# Altium PCB Buck.PcbDoc
Units mm, origin at the board's own origin, x right, y up, seen from the top; angles counter-clockwise.
Board outline 90 x 70 mm, 2 copper layers (Top Layer, Bottom Layer); 70 components, 46 nets, 283 pads, 89 vias.
Unrouted connection lines stored in the file: 49.
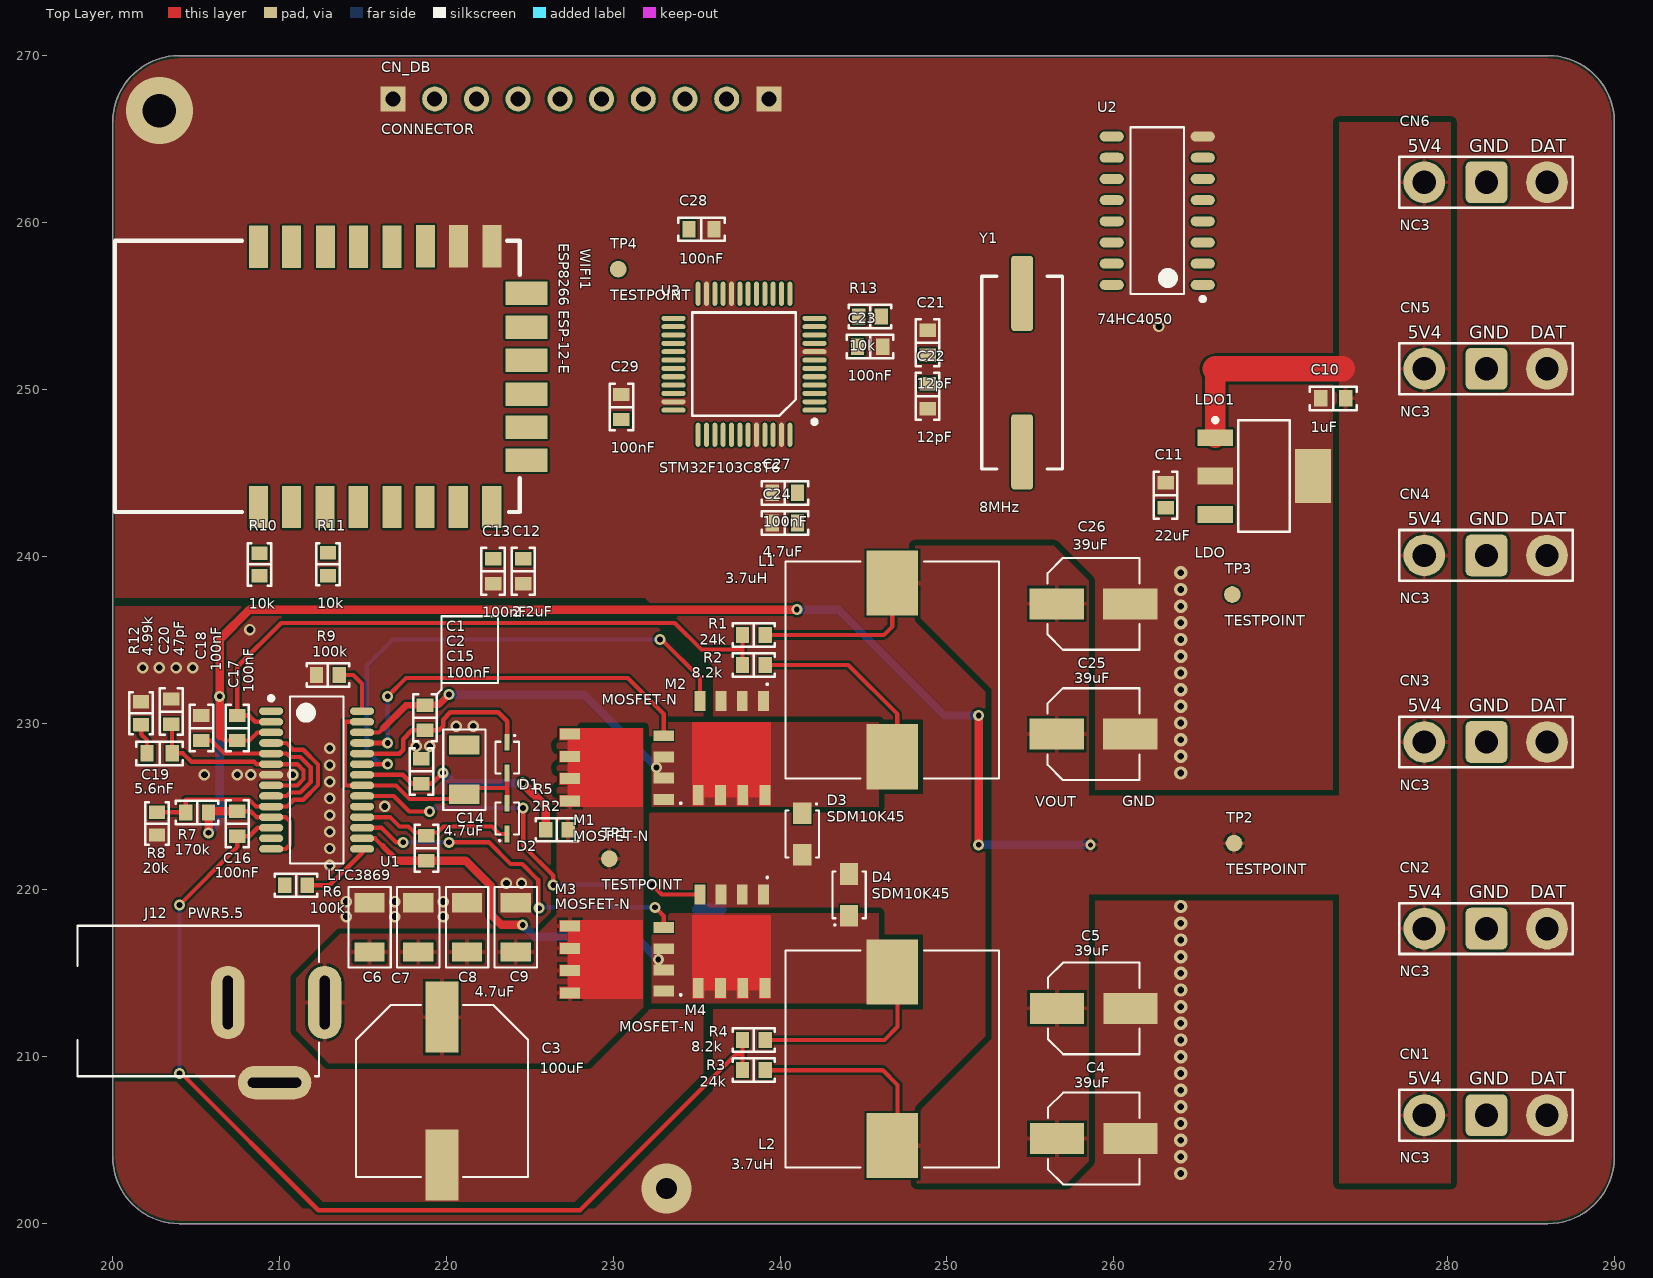
[diagram p0: Top Layer view]
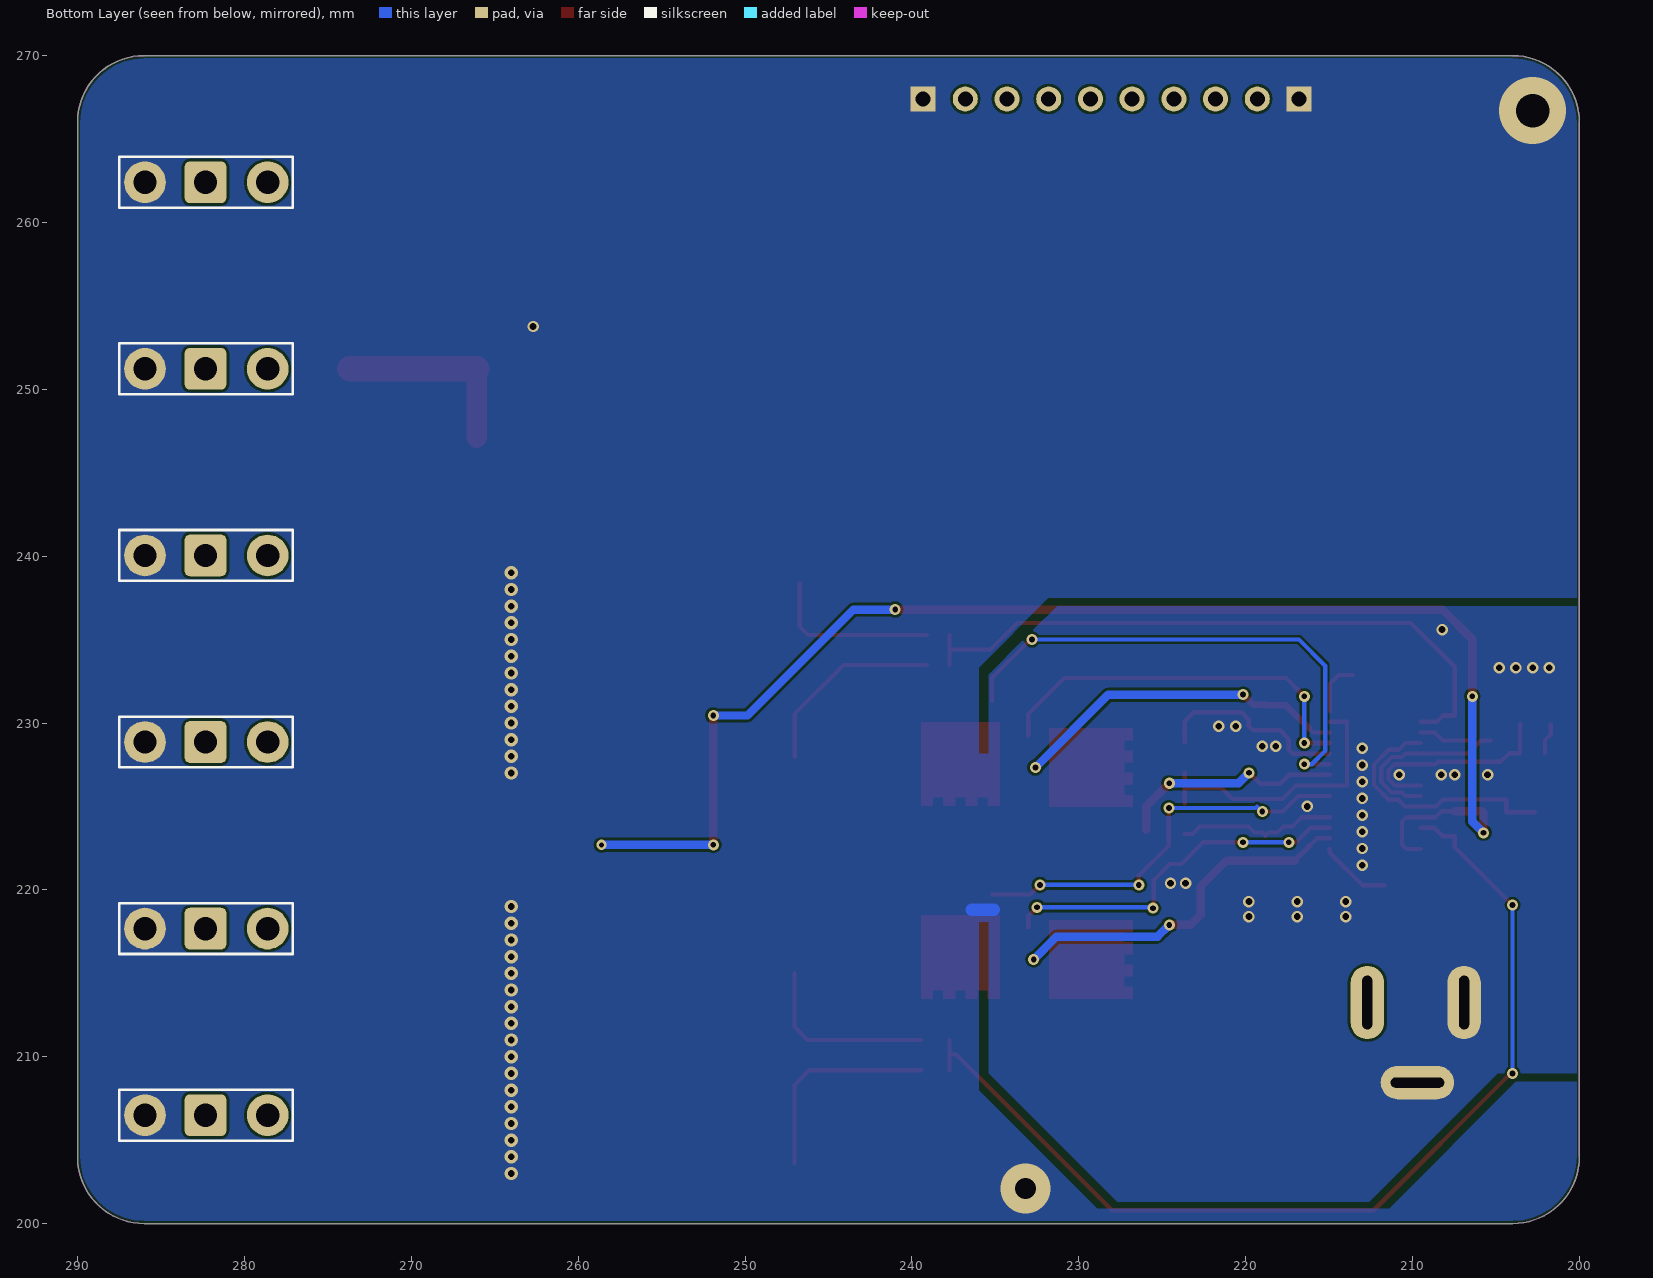
[diagram p1: Bottom Layer view, seen from below]

## Layer stack, top to bottom
Top Solder: solder mask 0.0102, Solder Resist, Dk 3.5
Top Layer: signal copper 0.0356
Dielectric 1: dielectric 0.32, FR-4, Dk 4.8
Bottom Layer: signal copper 0.0356
Bottom Solder: solder mask 0.0102, Solder Resist, Dk 3.5

## Board outline
204,200 cw(c204,204) 200,204 200,266 cw(c204,266) 204,270 286,270 cw(c286,266) 290,266 290,204 cw(c286,204) 286,200

## Design rules (kind name [scope] priority, off if disabled: settings)
Clearance Clearance_VOUT_TOP [(InComponent('L1') OR InComponent('L2')) AND (InNet('VOUT') OR InNet('SW1') OR InNet('SW2')) vs InNet('GND')] p1: gap=0.152 except(0.305: SMDPad-Poly; 0.5: Poly-Poly)
Clearance [All] p2: gap=0.152 except(0.102: SMDPad-Poly; 0.35: Poly-Poly)
HoleSize [All] p1: absolutevalues=TRUE maxlimit=4 minlimit=0.025 maxpercent=80.000 minpercent=20.000
MinimumSolderMaskSliver [All] p1: minsoldermaskwidth=0.152
PolygonConnect PolygonConnect_J12 [InNet('GND') vs HasFootprint('DC_CON') OR HasFootprint('CAPAE6053X59M')] p1: connectstyle=Direct reliefconductorwidth=0.254 reliefentries=4 polygonreliefangle="90 Angle" airgapwidth=0.254
PolygonConnect PolygonConnect_VIN [InNet('VIN') or InNet('SW1') or InNet('SW2') or InNet('VOUT') or ((IsVia OR IsPad) ANd InNet('GND'))] p2: connectstyle=Direct reliefconductorwidth=0.254 reliefentries=4 polygonreliefangle="90 Angle" airgapwidth=0.152
PolygonConnect [All] p3: connectstyle=Relief reliefconductorwidth=0.254 reliefentries=4 polygonreliefangle="90 Angle" airgapwidth=0.152
RoomDefinition XmasLights [InComponentClass('XmasLights')] p1: confinementstyle=ConfineIn formatcopy=TRUE lockcomponents=FALSE outline 0,0 50.8,0 50.8,25.4 0,25.4
RoutingVias [All] p1: holewidth=0.35 width=0.66 viastyle="Through Hole" minholewidth=0.3 minwidth=0.61 maxholewidth=1 maxwidth=1.372
SilkToSilkClearance [All vs False] p1: silktosilkclearance=0.254
SilkToSolderMaskClearance [False] p1: minsilkscreentomaskgap=0.254 clearancetoexposedcopper=TRUE
SolderMaskExpansion SolderMaskExpansion_via [IsVia] p1: expansion=0
SolderMaskExpansion [All] p2: expansion=0.102
Width [All] p1: maxlimit=1.219 minlimit=0.152 preferedwidth=0.152
26 further rules are at their usual default settings.

## Classes and differential pairs
component class XmasLights: C10 C11 C12 C13 C21 C22 C23 C24 C27 C28 C29 CN1 CN2 CN3 CN4 CN5 CN6 CN_DB J12 LDO1 R10 R11 R13 TP1 TP2 TP3 TP4 U2 U3 WIFI1 Y1
component class PowerBuck: C1 C2 C3 C4 C5 C6 C7 C8 C9 C14 C15 C16 C17 C18 C19 C20 C25 C26 D1 D2 D3 D4 L1 L2 M1 M2 M3 M4 R1 R2 R3 R4 R5 R6 R7 R8 R9 R12 U1

## Components (designator, comment, footprint, x,y, rotation, side; value= is the part's Value field where it differs from the comment)
C1 "100nF" "CAP 0603/1608" 218.716,230.311 r270 top
C2 "100nF" "CAP 0603/1608" 218.8,222.5 r270 top
C3 "100uF" CAPAE115102X102N 219.737,207.948 r270 top
C4 "39uF" CAPAE6053X59M 258.796,205.096 r0 top
C5 "39uF" CAPAE6053X59M 258.796,212.9 r0 top
C6 "4.7uF" CAP1206 215.395,217.753 r270 top
C7 "4.7uF" CAP1206 218.317,217.753 r270 top
C8 "4.7uF" CAP1206 221.238,217.753 r270 top
C9 "4.7uF" CAP1206 224.159,217.753 r270 top
C10 "1uF" "CAP 0603/1608" 273.143,249.454 r180 top
C11 "22uF" "CAP 0603/1608" 263.1,243.65 r90 top
C12 "2.2uF" "CAP 0603/1608" 224.604,239.1 r270 top
C13 "100nF" "CAP 0603/1608" 222.8,239.1 r270 top
C14 "4.7uF" CAP1206 221.078,227.205 r270 top
C15 "100nF" "CAP 0603/1608" 218.5,227.1 r90 top
C16 "100nF" "CAP 0603/1608" 207.469,223.961 r270 top
C17 "100nF" "CAP 0603/1608" 207.469,229.7 r90 top
C18 "100nF" "CAP 0603/1608" 205.316,229.7 r90 top
C19 "5.6nF" "CAP 0603/1608" 202.811,228.181 r180 top
C20 "47pF" "CAP 0603/1608" 203.511,230.685 r90 top
C21 "12pF" "CAP 0603/1608" 248.84,252.786 r270 top
C22 "12pF" "CAP 0603/1608" 248.84,249.582 r90 top
C23 "100nF" "CAP 0603/1608" 245.389,252.554 r0 top
C24 "4.7uF" "CAP 0603/1608" 240.287,241.987 r180 top
C25 "39uF" CAPAE6053X59M 258.78,229.336 r0 top
C26 "39uF" CAPAE6053X59M 258.78,237.14 r0 top
C27 "100nF" "CAP 0603/1608" 240.287,243.791 r180 top
C28 "100nF" "CAP 0603/1608" 235.287,259.587 r0 top
C29 "100nF" "CAP 0603/1608" 230.487,248.937 r90 top
CN1 "NC3" LEDCON3 282.3,206.5 r0 top
CN2 "NC3" LEDCON3 282.3,217.681 r0 top
CN3 "NC3" LEDCON3 282.3,228.861 r0 top
CN4 "NC3" LEDCON3 282.3,240.042 r0 top
CN5 "NC3" LEDCON3 282.3,251.222 r0 top
CN6 "NC3" LEDCON3 282.3,262.403 r0 top
CN_DB "CONNECTOR" "Edge Connector" 236.8,267.4 r180 top
D1 "SDM10K45" DIOM1713X11N 223.641,227.929 r270 top
D2 "SDM10K45" DIOM1713X11N 223.641,224.275 r90 top
D3 "SDM10K45" DIOM2618X11N 241.326,223.351 r270 top
D4 "SDM10K45" DIOM2618X11N 244.13,219.7 r90 top
J12 "PWR5.5" DC_CON 209.706,208.45 r0 top
L1 "3.7uH" INDP130128X62N 246.726,233.18 r90 top
L2 "3.7uH" INDP130128X62N 246.726,209.871 r270 top
LDO1 "LDO" SOT230P700X180-4N 269,244.8 r0 top
M1 "MOSFET-N" INF-PG-TDSON-8-1_V 230.2,227.329 r90 top
M2 "MOSFET-N" INF-PG-TDSON-8-1_V 237.096,228.479 r180 top
M3 "MOSFET-N" INF-PG-TDSON-8-1_V 230.2,215.835 r90 top
M4 "MOSFET-N" INF-PG-TDSON-8-1_V 237.096,216.9 r180 top
R1 "24k" "RES 0603/1608" 238.421,235.276 r180 top
R2 "8.2k" "RES 0603/1608" 238.421,233.471 r180 top
R3 "24k" "RES 0603/1608" 238.421,209.196 r0 top
R4 "8.2k" "RES 0603/1608" 238.421,211 r180 top
R5 "2R2" "RES 0603/1608" 226.625,223.6 r180 top
R6 "100k" "RES 0603/1608" 210.99,220.275 r0 top
R7 "170k" "RES 0603/1608" 205.064,224.646 r0 top
R8 "20k" "RES 0603/1608" 202.66,223.966 r270 top
R9 "100k" "RES 0603/1608" 212.9,232.883 r180 top
R10 "10k" "RES 0603/1608" 208.8,239.5 r90 top
R11 "10k" "RES 0603/1608" 212.9,239.515 r90 top
R12 "4.99k" "RES 0603/1608" 201.707,230.585 r90 top
R13 "10k" "RES 0603/1608" 245.389,254.358 r180 top
TP1 "TESTPOINT" TESTPOINT 229.765,221.865 r90 top
TP2 "TESTPOINT" TESTPOINT 267.2,222.8 r90 top
TP3 "TESTPOINT" TESTPOINT 267.1,237.7 r90 top
TP4 "TESTPOINT" TESTPOINT 230.3,257.2 r90 top
U1 "LTC3869" SOP64P600X175-28N 212.223,226.579 r0 top
U2 "74HC4050" SOIC127P600X175-16N 262.6,260.7 r180 top
U3 "STM32F103C8T6" CQFP50P900X900X160-48N 237.835,251.5 r180 top
WIFI1 "ESP8266 ESP-12-E" "ESP8266 ESP-12-E" 225.156,259.53 r90 top
Y1 "8MHz" CRYSTAL 254.5,251 r90 top

## Footprints (in the part's own frame and the unit in brackets; to place one, negate y for a bottom-side part, rotate by r counter-clockwise, add the part's x,y. Pads: shape width x height; smd on the part's side, far side on the other; paste and mask are expansions set on the pad)
CAP1206 [mm]
  rrect1% 1.16x1.82 smd: 1(1.475,0) 2(-1.475,0)
  silkscreen extent -2.41,-1.27 2.41,1.27, body extent -1.6,-0.81 1.6,0.81, height 0.57
"CAP 0603/1608" [mm] "Chip Capacitor, 2-Leads, Body 1.60x0.80mm, IPC Medium Density"
  rrect1% 0.8x1 smd: 1(-0.75,0) 2(0.75,0)
  silkscreen extent -1.4,-0.7 1.4,0.7, body extent -0.8,-0.41 0.8,0.41, height 0.82
CAPAE6053X59M [mm] "Aluminum Electrolytic Capacitor, Body 5.30x5.30x5.90mm, IPC Low Density"
  rect 3.25x1.85 smd: 1(-2.2,0) 2(2.2,0)
  silkscreen extent -2.75,-2.75 2.75,2.75, body extent -3,-2.75 3,2.75, height 5.9
CAPAE115102X102N [mm] "Aluminum Electrolytic Capacitor, Body 10.25x10.25x10.20mm, IPC Medium Density"
  rect 4.25x1.95 smd: 1(-4.425,0) 2(4.425,0)
  silkscreen extent -5.15,-5.15 5.15,5.15, body extent -5.77,-5.15 5.77,5.15, height 10.2
CQFP50P900X900X160-48N [mm] "CQFP, 48-Leads, Body 9.00x9.00mm, Pitch 0.50mm, IPC Medium Density"
  oval 1.45x0.3 smd: 1(-4.225,2.75) 2(-4.225,2.25) 3(-4.225,1.75) 4(-4.225,1.25) 5(-4.225,0.75) 6(-4.225,0.25) 7(-4.225,-0.25) 8(-4.225,-0.75) 9(-4.225,-1.25) 10(-4.225,-1.75) 11(-4.225,-2.25) 12(-4.225,-2.75) 25(4.225,-2.75) 26(4.225,-2.25) 27(4.225,-1.75) 28(4.225,-1.25) 29(4.225,-0.75) 30(4.225,-0.25) 31(4.225,0.25) 32(4.225,0.75) 33(4.225,1.25) 34(4.225,1.75) 35(4.225,2.25) 36(4.225,2.75)
  oval 0.3x1.45 smd: 13(-2.75,-4.225) 14(-2.25,-4.225) 15(-1.75,-4.225) 16(-1.25,-4.225) 17(-0.75,-4.225) 18(-0.25,-4.225) 19(0.25,-4.225) 20(0.75,-4.225) 21(1.25,-4.225) 22(1.75,-4.225) 23(2.25,-4.225) 24(2.75,-4.225) 37(2.75,4.225) 38(2.25,4.225) 39(1.75,4.225) 40(1.25,4.225) 41(0.75,4.225) 42(0.25,4.225) 43(-0.25,4.225) 44(-0.75,4.225) 45(-1.25,4.225) 46(-1.75,4.225) 47(-2.25,4.225) 48(-2.75,4.225)
  silkscreen extent -4.35,-3.1 3.1,3.57, body extent -4.6,-4.6 4.6,4.6, height 1.45
CRYSTAL [mm] "Crystal, 2-Leads, Body 4.70x11.40mm, Pitch 8.80mm, IPC Medium Density"
  rrect25% 4.5x1.3 smd: 1(-4.75,0) 2(4.75,0)
  silkscreen extent -5.77,-2.43 5.77,2.43, body extent -6.35,-2.35 6.35,2.35, height 4.2
DC_CON [mm]
  oval 2x4.4 hole 0.6 slot 3.2 at 90 deg paste-2.54: 1(3,4.8) 2(-2.8,4.8)
  oval 4.4x2 hole 0.6 slot 3.2 at 0 deg paste-2.54: 3(0,0)
  silkscreen extent -11.81,0.38 2.67,9.4, body extent -11.83,0.43 2.67,9.43, height 10
DIOM1713X11N [mm] "Molded Diode, 2-Leads, Body 1.70x1.30mm, IPC Medium Density"
  rect 1x0.3 smd: 1(-0.925,0) 2(0.925,0)
  silkscreen extent -1.37,-0.7 0.95,0.7, body extent -1.12,-0.7 1.12,0.7, height 1.1
DIOM2618X11N [mm] "Molded Diode, 2-Leads, Body 2.60x1.80mm, IPC Medium Density"
  rect 1.3x1.1 smd: 1(-1.25,0) 2(1.25,0)
  silkscreen extent -1.85,-1 1.4,1, body extent -1.62,-1 1.62,1, height 1.1
"Edge Connector" [mm]
  rrect100% 1.5x1.5 hole 0.9: 1(0,0) 2(2.5,0) 3(5,0) 4(7.5,0) 5(10,0) 6(12.5,0) 7(15,0) 8(17.5,0)
  rrect1% 1.5x1.5 hole 0.9: 9(-2.54,0) 9(20,0)
"ESP8266 ESP-12-E" [mil] "ESP8266 ESP-12-E"
  rrect1% 100x45 smd: 1(-653,646) 2(-653,568) 3(-653,489) 4(-653,411) 5(-653,331) 6(-653,253) 7(-653,175) 8(-653,96) 15(-38,95) 16(-38,174) 17(-38,252) 18(-39,331) 19(-39,410) 20(-39,488) 21(-39,568) 22(-39,646)
  rrect1% 55x100 smd: 9(-543,14) 10(-465,14) 11(-387,14) 12(-307,14) 13(-229,14) 14(-149,14)
  silkscreen extent -665,30 -25,985
INDP130128X62N [mm] "Precision Wire Wound Inductor, 2-Leads, Body 13.00x12.80mm, IPC Medium Density"
  rect 3.9x3.1 smd: 1(-5.2,0) 2(5.2,0)
  silkscreen extent -6.5,-6.4 6.5,6.4, body extent -6.6,-6.4 6.6,6.4, height 6.3
INF-PG-TDSON-8-1_V [mm] "TDSON, 8-Leads, Body 6.15x5.15mm, Pitch 1.27mm"
  rect 0.65x1.2 smd: 1(-1.905,-2.825) 2(-0.635,-2.825) 3(0.635,-2.825) 4(1.905,-2.825) 5(2.007,2.794) 6(0.66,2.794) 7(-0.66,2.794) 8(-2.007,2.794)
  Top Layer region: -2.35,2.925 -2.35,-1.575 2.35,-1.575 2.35,2.925
  Top Layer region: -2.35,2.925 -1.65,2.925 -1.65,3.425 -2.35,3.425
  Top Layer region: 1.65,2.925 2.35,2.925 2.35,3.425 1.65,3.425
  Top Layer region: -1.015,2.925 -0.315,2.925 -0.315,3.425 -1.015,3.425
  Top Layer region: 0.315,2.925 1.015,2.925 1.015,3.425 0.315,3.425
  silkscreen extent -2.23,-3.94 -2.03,-3.74, body extent -2.58,-3.08 2.58,3.08, height 1
LEDCON3 [mm]
  round 2.5 hole 1.4 paste-2.54: 1(-3.692,0) 2(3.658,0)
  rrect25% 2.5x2.5 hole 1.4 paste-2.54: 3(0.033,0)
  silkscreen extent -5.21,-1.52 5.21,1.52
"RES 0603/1608" [mm] "Chip Resistor, 2-Leads, Body 1.60x0.80mm, IPC Medium Density"
  rrect1% 0.8x0.95 smd: 1(-0.68,0) 2(0.68,0)
  silkscreen extent -1.27,-0.7 1.27,0.7, body extent -0.8,-0.4 0.8,0.4, height 0.45
SOIC127P600X175-16N [mm] "SOIC, 16-Leads, Body 9.90x3.90mm, Pitch 1.27mm, IPC Medium Density"
  oval 1.45x0.6 smd: 1(-2.725,4.445) 2(-2.725,3.175) 3(-2.725,1.905) 4(-2.725,0.635) 5(-2.725,-0.635) 6(-2.725,-1.905) 7(-2.725,-3.175) 8(-2.725,-4.445) 9(2.725,-4.445) 10(2.725,-3.175) 11(2.725,-1.905) 12(2.725,-0.635) 13(2.725,0.635) 14(2.725,1.905) 15(2.725,3.175) 16(2.725,4.445)
  silkscreen extent -2.85,-5 1.6,5.42, body extent -3,-5 3,5, height 1.75
SOP64P600X175-28N [mm] "SOP, 28-Leads, Body 9.89x3.90mm, Pitch 0.64mm, IPC Medium Density"
  oval 1.45x0.45 smd: 1(-2.725,4.127) 2(-2.725,3.492) 3(-2.725,2.857) 4(-2.725,2.222) 5(-2.725,1.587) 6(-2.725,0.953) 7(-2.725,0.318) 8(-2.725,-0.318) 9(-2.725,-0.953) 10(-2.725,-1.587) 11(-2.725,-2.222) 12(-2.725,-2.857) 13(-2.725,-3.492) 14(-2.725,-4.127) 15(2.725,-4.127) 16(2.725,-3.492) 17(2.725,-2.857) 18(2.725,-2.222) 19(2.725,-1.587) 20(2.725,-0.953) 21(2.725,-0.318) 22(2.725,0.318) 23(2.725,0.953) 24(2.725,1.587) 25(2.725,2.222) 26(2.725,2.857) 27(2.725,3.492) 28(2.725,4.127)
  silkscreen extent -2.85,-5 1.6,5.03, body extent -3,-5 3,5, height 1.75
SOT230P700X180-4N [mm] "SOT223, 4-Leads, Body 6.50x7.00mm (avg), Pitch 2.30mm, IPC Medium Density"
  rrect1% 2.15x1 smd: 1(-2.925,2.3) 2(-2.925,0) 3(-2.925,-2.3)
  rrect1% 2.15x3.25 smd: 4(2.925,0)
  silkscreen extent -3.05,-3.35 1.55,3.47, body extent -3.5,-3.35 3.5,3.35, height 1.8
TESTPOINT [mm]
  round 1 smd: 1(0,0)

## Part data
C1 C2 C6 C7 C8 C9 C10 C11 C12 C13 C14 C15 C16 C17 C18 C19 C20 C21 C22 C23 C24 C27 C28 C29: library part CAP, "Capacitor"
C3 C4 C5 C25 C26: library part "E CAP"
CN_DB: "Debug Connector"
D1 D2 D3 D4: library part "D Schottky"
J12: library part PWR2.5, "Low Voltage Power Supply Connector"
L1 L2: library part Inductor, "Inductor"
LDO1: "LDO Voltage Regulator"
R1 R2 R3 R4 R5 R6 R7 R8 R9 R10 R11 R12 R13: library part RES, "Resistor"
U3: "Medium-density performance line ARM-based 32-bit MCU with 64 or 128 KB Flash, USB, CAN, 7 timers, 2 ADCs, 9 com. interfaces"
Y1: library part CRYSTAL, "Cheapo SMT Crystal"

## Via types
v1: diameter 0.8, hole 0.4, Top Layer to Bottom Layer, 30 vias
v2: diameter 0.66, hole 0.35, Top Layer to Bottom Layer, 21 vias
v3: diameter 0.686, hole 0.4, Top Layer to Bottom Layer, tented top, 18 vias
v4: diameter 0.686, hole 0.4, Top Layer to Bottom Layer, 7 vias
v5: diameter 0.686, hole 0.4, Top Layer to Bottom Layer, tented both sides, 6 vias
v6: diameter 0.66, hole 0.35, Top Layer to Bottom Layer, tented top, 4 vias
v7: diameter 0.61, hole 0.305, Top Layer to Bottom Layer, 1 vias
v8: diameter 4, hole 2, Top Layer to Bottom Layer, 1 vias
v9: diameter 3, hole 1.25, Top Layer to Bottom Layer, 1 vias

## Nets (pads, with @x,y where several pads share a name; then routed paths per layer and width w, separated by ;. In a path a pad name is that pad's centre, name@x,y a point inside that pad or via, vN(x,y) a via of type N, cw(c..) or ccw(c..) an arc to the next point about the centre after c; other vN are vias at no path point)
BG1: M2.4 U1.23 | length 31.2
  Top Layer w0.254: v2(232.8,235) 232.9,235 235.191,232.709 M2.4@235.191,231.325
  Top Layer w0.279: U1.23 v2(216.482,227.531)
  Bottom Layer w0.254: v2(216.482,227.531) 216.032,227.531 215.233,228.331 215.233,233.433 216.8,235 v2(232.8,235)
BG2: M4.4 U1.20 | length 24.6
  Top Layer w0.254: U1.20 215.526,225.626 215.526,225.622 216.844,225.622 217.777,224.689 v6(219,224.689) ; v2(224.6,224.9) 224.6,222.656 226.4,220.856 v2(226.4,220.3) ; v2(232.327,220.3) 232.902,219.725 M4.4
  Bottom Layer w0.254: v6(219,224.689) 219.311,225 219.411,224.9 v2(224.6,224.9) ; v2(226.4,220.3) v2(232.327,220.3)
BOOST1: C1.2 D1.1 U1.24 | length 11.8
  Top Layer w0.279: U1.24 217.186,228.166 217.41,228.39 217.41,229.034 217.936,229.561 C1.2 219.546,229.561 219.804,229.819 219.804,230.207 220.236,230.64 223.104,230.64 223.641,230.102 D1.1
BOOST2: C2.1 D2.1 U1.18 | length 9.6
  Top Layer w0.254: U1.18 216.628,224.356 217.185,223.8 217.72,223.8 218.083,223.437 218.613,223.437 C2.1 218.987,223.437 219.456,223.437 219.82,223.8 222.741,223.8 223.191,223.35 D2.1
DTR: CN_DB.6 WIFI1.18
FREQ: R9.1 U1.28 | length 3.2
  Top Layer w0.254: R9.1 214.417,232.883 214.948,232.352 U1.28
GND: C3.2 C4.2 C5.2 C6.2 C7.2 C8.2 C9.2 C10.2 C11.2 C12.2 C13.2 C18.2 C20.2 C21.1 C22.1 C23.2 C24.2 C25.2 C26.2 C27.2 C28.2 C29.2 CN1.2 CN2.2 CN3.2 CN4.2 CN5.2 CN6.2 CN_DB.9 D3.2 D4.2 J12.2 J12.3 LDO1.2 LDO1.4 M2.1 M2.2 M2.3 M4.1 M4.2 M4.3 R8.2 R9.2 R12.2 U1.7 U2.8 U3.8 U3.20 U3.23 U3.35 U3.44 U3.47 WIFI1.15 WIFI1.16 | length 1.3
  Top Layer w0.305: v4@216.291,224.991 v4(216.3,225)
  Bottom Layer w0.762: 235.1,218.8 236.4,218.8
  other v1: 264,203 264,204 264,205 264,206 264,207 264,208 264,209 264,210 264,211 264,212 264,213 264,214 264,215 264,216 264,217 264,218 264,219 264,227 264,228 264,229 264,230 264,231 264,232 264,233 264,234 264,235 264,236 264,237 264,238 264,239
  other v3: 214,218.4 216.9,218.4 219.8,218.4 214,219.3 216.9,219.3 219.8,219.3 213.008,221.479 213.008,222.479 213.008,223.479 213.008,224.479 213.008,225.479 213.008,226.479 210.8,226.9 213.008,227.479 213.008,228.479 220.6,229.8 221.6,229.8 262.7,253.76
  other v4: 205.5,226.896 201.8,233.307 202.8,233.307 203.8,233.307 204.8,233.307 208.226,235.6
  other v5: 223.6,220.4 224.5,220.4 207.469,226.9 208.28,226.896 218.2,228.607 218.996,228.607
  other v8: 202.8,266.7
  other v9: 233.2,202.1
HD0: CN1.3 U2.2
HD1: CN2.3 U2.4
HD2: CN3.3 U2.6
HD3: CN4.3 U2.10
HD4: CN5.3 U2.12
HD5: CN6.3 U2.15
INTVCC: C14.1 D1.2 D2.2 U1.21 U1.27 | length 17
  Top Layer w0.254: U1.27 213.916,230.071 213.916,226.261 U1.21 216.973,226.261 217.789,225.445 220.794,225.445 C14.1 221.451,226.102 223.641,226.102 ; D2.2@223.641,225.194 D2.2 223.641,226.102 ; D1.2@223.641,227.029 D1.2 223.641,226.102
ITH: C19.1 C20.1 U1.6 U1.8 | length 12.7
  Top Layer w0.254: C20.1 203.561,229.885 C19.1 204.219,228.181 204.719,227.681 208.478,227.681 208.628,227.531 U1.6 209.502,227.535 211.063,227.535 211.435,227.163 211.435,226.637 211.06,226.261 U1.8
LD0: U2.3 U3.10
LD1: U2.5 U3.11
LD2: U2.7 U3.12
LD3: U2.9 U3.13
LD4: U2.11 U3.14
LD5: U2.14 U3.15
NetC14_2: C14.2 C15.2 U1.19
NetC19_2: C19.2 R12.1 | length 1.9
  Top Layer w0.254: R12.1 201.707,229.329 202.061,228.975 C19.2
NetR11_2: R11.2 WIFI1.3
OSC_IN: C22.2 U3.5 Y1.1
OSC_OUT: C21.2 U3.6 Y1.2
PGOOD: R6.2 U1.15 | length 4.3
  Top Layer w0.279: R6.2 212.995,220.275 214.948,222.228 U1.15
RST1: C23.1 CN_DB.5 R13.2 U3.7
RTS: CN_DB.1 R10.2 WIFI1.1
RX0: CN_DB.7 WIFI1.21
SENSE1+: C17.2 R1.2 R2.2 U1.2 | length 38.9
  Top Layer w0.254: C17.2 207.469,233.369 210.1,236 233.685,236 235.285,234.4 237.741,234.4 ; R2.2 237.741,234.4 ; R1.2 237.741,234.4
  Top Layer w0.279: C17.2 208.166,230.45 208.544,230.071 U1.2
SENSE2+: C16.2 R3.1 R4.2 U1.12 | length 60.7
  Top Layer w0.254: v2(204,209) 204.123,209 212.323,200.8 228,200.8 237.341,210.141 237.741,210.141 ; v2(204,219.1) 207.469,222.569 C16.2 ; R3.1 237.741,210.141 ; R4.2 237.741,210.141
  Top Layer w0.279: C16.2 208.177,223.211 208.688,223.721 U1.12
  Bottom Layer w0.254: v2(204,209) v2(204,219.1)
SS: C18.1 U1.5 U1.9 | length 10.8
  Top Layer w0.254: C18.1 205.911,228.95 206.695,228.166 U1.5 210.432,228.166 210.631,227.967 211.242,227.967 211.867,227.342 211.867,226.458 211.238,225.83 210.628,225.83 210.425,225.626 U1.9
SW1: C1.1 D3.1 L1.1 M1.1 M1.2 M1.3 M2.5 M2.6 M2.7 M2.8 R2.1 U1.26 | length 32.1
  Top Layer w0.254: U1.26 215.952,229.436 216.215,229.7 ; R2.1 244.084,233.471 247.026,230.53 L1.1@247.026,227.98
  Top Layer w0.406: 216.215,229.7 217.576,231.061 C1.1 218.755,231.1 219.548,231.1 v2(220.148,231.7)
  Bottom Layer w0.508: v2(220.148,231.7) 228.229,231.7 v6(232.6,227.329)
SW2: C2.2 D4.1 L2.1 M3.1 M3.2 M3.3 M4.5 M4.6 M4.7 M4.8 R4.1 U1.16 | length 32.9
  Top Layer w0.254: U1.16 215.729,223.086 216.181,222.635 ; R4.1@239.417,211 246.247,211 247.041,211.794 L2.1@247.041,215
  Top Layer w0.33: 216.181,222.635 217.066,221.75
  Top Layer w0.508: 217.066,221.75 C2.2 221.144,221.75 222.7,220.194 222.7,218.5 223.3,217.9 v2(224.575,217.9)
  Bottom Layer w0.508: v2(224.575,217.9) 225.275,217.2 231.335,217.2 v6(232.7,215.835)
SWCLK: CN_DB.4 U3.37
SWDIO: CN_DB.3 U3.34
TG1: M1.4 U1.25 | length 23.5
  Top Layer w0.254: v2(216.481,231.6) 217.581,232.7 230.872,232.7 233.025,230.547 M1.4
  Top Layer w0.279: U1.25 214.949,228.8 v2(216.481,228.8)
  Bottom Layer w0.254: v2(216.481,228.8) v2(216.481,231.6)
TG2: M3.4 U1.17 | length 22
  Top Layer w0.254: U1.17 216.115,223.721 216.984,222.852 v2(217.41,222.852) ; v2(220.148,222.852) 222.548,222.852 223.845,221.555 224.545,221.555 225.5,220.6 225.5,218.958 v2(225.558,218.9) ; v2(232.5,218.957) 233.025,218.432 M3.4
  Bottom Layer w0.254: v2(217.41,222.852) v2(220.148,222.852) ; v2(225.558,218.9) 225.615,218.957 v2(232.5,218.957)
TX0: CN_DB.8 WIFI1.22
TX1: TP4.1 U3.22 WIFI1.17
VCC3_3: C11.1 C12.1 C13.1 C24.1 C27.1 C28.1 C29.1 CN_DB.2 LDO1.3 R10.1 R11.1 R13.1 TP3.1 U2.1 U3.9 U3.24 U3.36 U3.48 WIFI1.8
VCC5_7: C4.1 C5.1 C10.1 C16.1 C17.1 C25.1 C26.1 CN1.1 CN2.1 CN3.1 CN4.1 CN5.1 CN6.1 L1.2 L2.2 LDO1.1 R1.1 R3.2 R7.2 TP2.1 U1.3 U1.11 U1.14 | length 124.9
  Top Layer w0.254: R7.2 R7.2@205.809,224.711 ; 206.416,229.2 206.666,228.95 C17.1 208.184,228.95 208.67,229.436 U1.3 ; C16.1 208.263,224.711 208.618,224.356 U1.11 210.366,224.356 210.623,224.1 210.623,222.7 210.375,222.451 U1.14 ; R1.1 246.215,235.276 246.726,235.786 L1.2 ; R3.2@239.417,209.196 246.146,209.196 247.041,208.3 L2.2@247.041,203.6
  Top Layer w0.508: v2(205.744,223.421) R7.2 ; R7.2@205.809,224.711 C16.1 ; 206.416,229.2 v2(206.416,231.6) 206.416,235.016 208.2,236.8 v2(241,236.8) ; v2(251.9,222.7) v2(251.9,230.45)
  Top Layer w1.219: LDO1.1 266.075,251.222
  Top Layer w1.524: 266.075,251.222 273.7,251.222
  Bottom Layer w0.508: v2(205.744,223.421) 206.416,224.092 v2(206.416,231.6) ; v2(241,236.8) 243.5,236.8 249.85,230.45 v2(251.9,230.45) ; v2(251.9,222.7) v7(258.6,222.7) v7@258.575,222.675
VCC24: C3.1 C6.1 C7.1 C8.1 C9.1 J12.1 M1.5 M1.6 M1.7 M1.8 M3.5 M3.6 M3.7 M3.8 R5.1 TP1.1
VFB: R7.1 R8.1 U1.4 U1.10 | length 15.7
  Top Layer w0.254: R8.1 R7.1 204.384,225.413 208.171,225.413 208.593,224.991 U1.10 210.443,224.991 210.849,225.398 211.417,225.398 212.299,226.279 212.299,227.521 211.421,228.399 210.81,228.399 210.407,228.801 U1.4
VIN2: C15.1 R5.2 U1.22 | length 13.7
  Top Layer w0.279: U1.22 217.374,226.896 217.914,226.356 219.132,226.356 v2(219.792,227.016)
  Top Layer w0.508: v6(224.575,226.389) 225.945,225.019 R5.2
  Bottom Layer w0.508: v2(219.792,227.016) 220.42,226.389 v6(224.575,226.389)
pads on no net: R6.1 U1.1 U1.13 U2.13 U2.16 U3.1 U3.2 U3.3 U3.4 U3.16 U3.17 U3.18 U3.19 U3.21 U3.25 U3.26 U3.27 U3.28 U3.29 U3.30 U3.31 U3.32 U3.33 U3.38 U3.39 U3.40 U3.41 U3.42 U3.43 U3.45 U3.46 WIFI1.2 WIFI1.4 WIFI1.5 WIFI1.6 WIFI1.7 WIFI1.9 WIFI1.10 WIFI1.11 WIFI1.12 WIFI1.13 WIFI1.14 WIFI1.19 WIFI1.20

## Polygon pours and split planes (outlines as drawn)
GND on Top Layer "GND_JOIN" (solid, pour order 25): 235,228.143 236.5,228.143 236.5,218.167 235,218.167
VCC24 on Top Layer "VIN_TOP" (solid, pour order 12): 231.8,212.959 231.8,229.7 226.625,229.7 226.625,218.525 225.457,217.357 213.641,217.357 211,214.716 211,211.543 212.943,209.6 228.449,209.6
SW2 on Top Layer "SW1_TOP" (solid, remove dead copper, pour order 13): 232.316,218.6 245.9,218.6 245.9,213.2 232.316,213.2
SW1 on Top Layer "SW2_TOP" (solid, remove dead copper, pour order 16): 232.316,230.054 245.9,230.054 245.9,224.975 232.316,224.975
VCC5_7 on Top Layer "VOUT_TOP" (solid, remove dead copper, pour order 17): 258.5,238.522 258.5,225.626 273.5,225.626 273.5,266 280.2,266 280.2,202.425 273.5,202.425 273.5,219.725 258.5,219.725 258.5,203.746 257.179,202.425 248.2,202.425 248.2,206.6 252.676,211.076 252.676,232.024 248.1,236.6 248.1,240.635 256.387,240.635
GND on Top Layer "GND_TOP" (solid, pour order 20): 200,209 204.9,209 212.6,201.3 227.705,201.3 235.405,209 235.405,215.905 235.405,232.995 231.4,237 200,237
GND on Top Layer "PGND_TOP" (solid, remove dead copper, pour order 18): 290,200 290,270 200,270 200,237.5 231.9,237.5 236,233.4 236,208 228.9,200.9 211.4,200.9 203.8,208.5 200,208.5 200,200
GND on Bottom Layer "GND_JOIN" (solid, pour order 27): 235,228.143 236.5,228.143 236.5,218.1 235,218.1
GND on Bottom Layer "GND_BOTTOM" (solid, remove dead copper, pour order 24): 200,209 204.9,209 212.6,201.3 227.705,201.3 235.405,209 235.405,215.905 235.405,232.895 231.3,237 200,237
GND on Bottom Layer "PGND_BOTTOM" (solid, remove dead copper, pour order 22): 290,200 290,270 200,270 200,237.5 231.825,237.5 236,233.325 236,208 228.898,200.898 211.402,200.898 203.8,208.5 200,208.5 200,200

## Keep-outs
Keep-Out Layer:
  the board outline again, w0.025

## Silkscreen, mask and mechanical layers (free items; w line width, h text height)
Top Overlay:
  lines w0.127: 219.416,231.711 219.7,231.995 219.7,236.4 223.1,236.4 223.1,232.4 219.7,232.4
  text "VOUT" at 255.286,224.991 h0.64
  text "GND" at 260.5,225 h0.64

## Dimensions
200,204 to 290,204 on Mechanical 2
204,200 to 204,270 on Mechanical 2

## Text inside footprints (layer, text, board x,y; h text height)
CN1: Top Overlay "GND" at 281.284,208.312 h0.76; Top Overlay "DAT" at 284.967,208.312 h0.76; Top Overlay "5V4" at 277.601,208.312 h0.76
CN2: Top Overlay "GND" at 281.284,219.493 h0.76; Top Overlay "DAT" at 284.967,219.493 h0.76; Top Overlay "5V4" at 277.601,219.493 h0.76
CN3: Top Overlay "GND" at 281.284,230.673 h0.76; Top Overlay "DAT" at 284.967,230.673 h0.76; Top Overlay "5V4" at 277.601,230.673 h0.76
CN4: Top Overlay "GND" at 281.284,241.854 h0.76; Top Overlay "DAT" at 284.967,241.854 h0.76; Top Overlay "5V4" at 277.601,241.854 h0.76
CN5: Top Overlay "GND" at 281.284,253.034 h0.76; Top Overlay "DAT" at 284.967,253.034 h0.76; Top Overlay "5V4" at 277.601,253.034 h0.76
CN6: Top Overlay "GND" at 281.284,264.215 h0.76; Top Overlay "DAT" at 284.967,264.215 h0.76; Top Overlay "5V4" at 277.601,264.215 h0.76